# EAGLE board pcb (EAGLE 7.7.0)
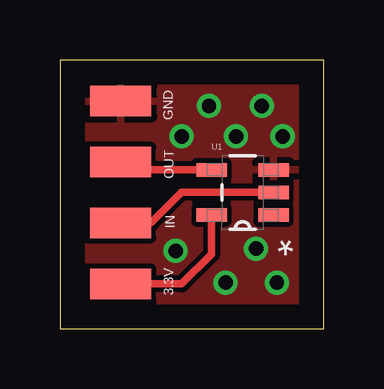
[diagram p0: board, top side]
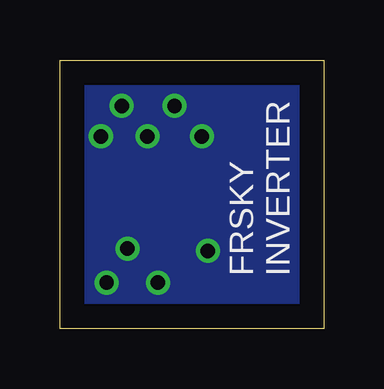
[diagram p1: board, bottom side, seen from below]

Size 11 x 11.2 mm. Coordinates in mm from the lower left corner, seen from the top.
Outline: 0,0 11,0 11,11.2 0,11.2 0,0
Copper layers (1*16): Top 0.035mm / dielectric 1.5mm / Bottom 0.035mm
Design rules "default": minimum track width 10mil, minimum drill 24mil, track to track 8mil, track to pad 8mil, pad to pad 8mil, via to via 8mil, smd to smd 8mil, copper to edge 40mil, drill to drill 8mil, minimum pad ring 10mil, minimum via ring 8mil, stop-mask expansion 4mil, vias tented up to drill 0mil, thermal gap 10mil

## Footprints (pad centres in the part's own frame; a part is rotated, then mirrored left to right if it is on the bottom)
SMD1,27-2,54 = smd 1.27 x 2.54: 1 0,0
SOT95P280X145-5N = smd 1.27 x 0.559: 1 -1.295,0.94; 2 -1.295,0; 3 -1.295,-0.94; 4 1.295,-0.94; 5 1.295,0.94

## Placement (x,y rotation side)
3.3V  [SMD1,27-2,54]  2.54,1.87 90 top
GND  [SMD1,27-2,54]  2.54,9.49 90 top
IN  [SMD1,27-2,54]  2.54,4.41 90 top
OUT  [SMD1,27-2,54]  2.54,6.95 90 top
U1  1A1G04QDBVRG4Q1  [SOT95P280X145-5N]  7.62,5.68 180 top

## Library data of the parts
3.3V GND IN OUT = wirepad; OC_FARNELL: unknown
U1 = Texas Instruments_By_element14_Batch_1; MF: TEXAS INSTRUMENTS; MPN: SN74LVC1G04DBVR; OC_FARNELL: 1287591; OC_NEWARK: 09R6710; PACKAGE: SOT-23-5; SUPPLIER: Texas Instruments

## Nets
3.3V: 3.3V.1 U1.5
GND: GND.1 U1.3
N$2: IN.1 U1.2
N$4: OUT.1 U1.4

## Tracks (layer width: path | path; a pad name or v marks a point on that pad's centre or on a via)
3.3V
  Top 0.305: U1.5 6.33,3.12 5.08,1.87 3.3V.1
GND  (via drill 0.6)
  other vias: 8.42,9.29 9.29,8.02 7.35,8.02 4.83,3.25 5.08,8.02 8.18,3.34 6.22,9.29 9.05,1.92 6.91,1.92
  pour Top: 0,11.16 11.43,11.16 11.43,0 0,0
  pour Bottom: 0,11.16 11.43,11.16 11.43,0 0,0
N$2
  Top 0.305: U1.2 5.08,5.68 3.81,4.41 IN.1
N$4
  Top 0.305: U1.4 2.87,6.62 OUT.1

## Text on the board
bNames: FRSKY / INVERTER